# Altium PCB SlowDanceBot.PcbDoc
Units mm, origin at the board's own origin, x right, y up, seen from the top; angles counter-clockwise.
Board outline 56.05 x 45.55 mm, 2 copper layers (Top Layer, Bottom Layer); 62 components, 35 nets, 152 pads, 42 vias.
Unrouted connection lines stored in the file: 1.
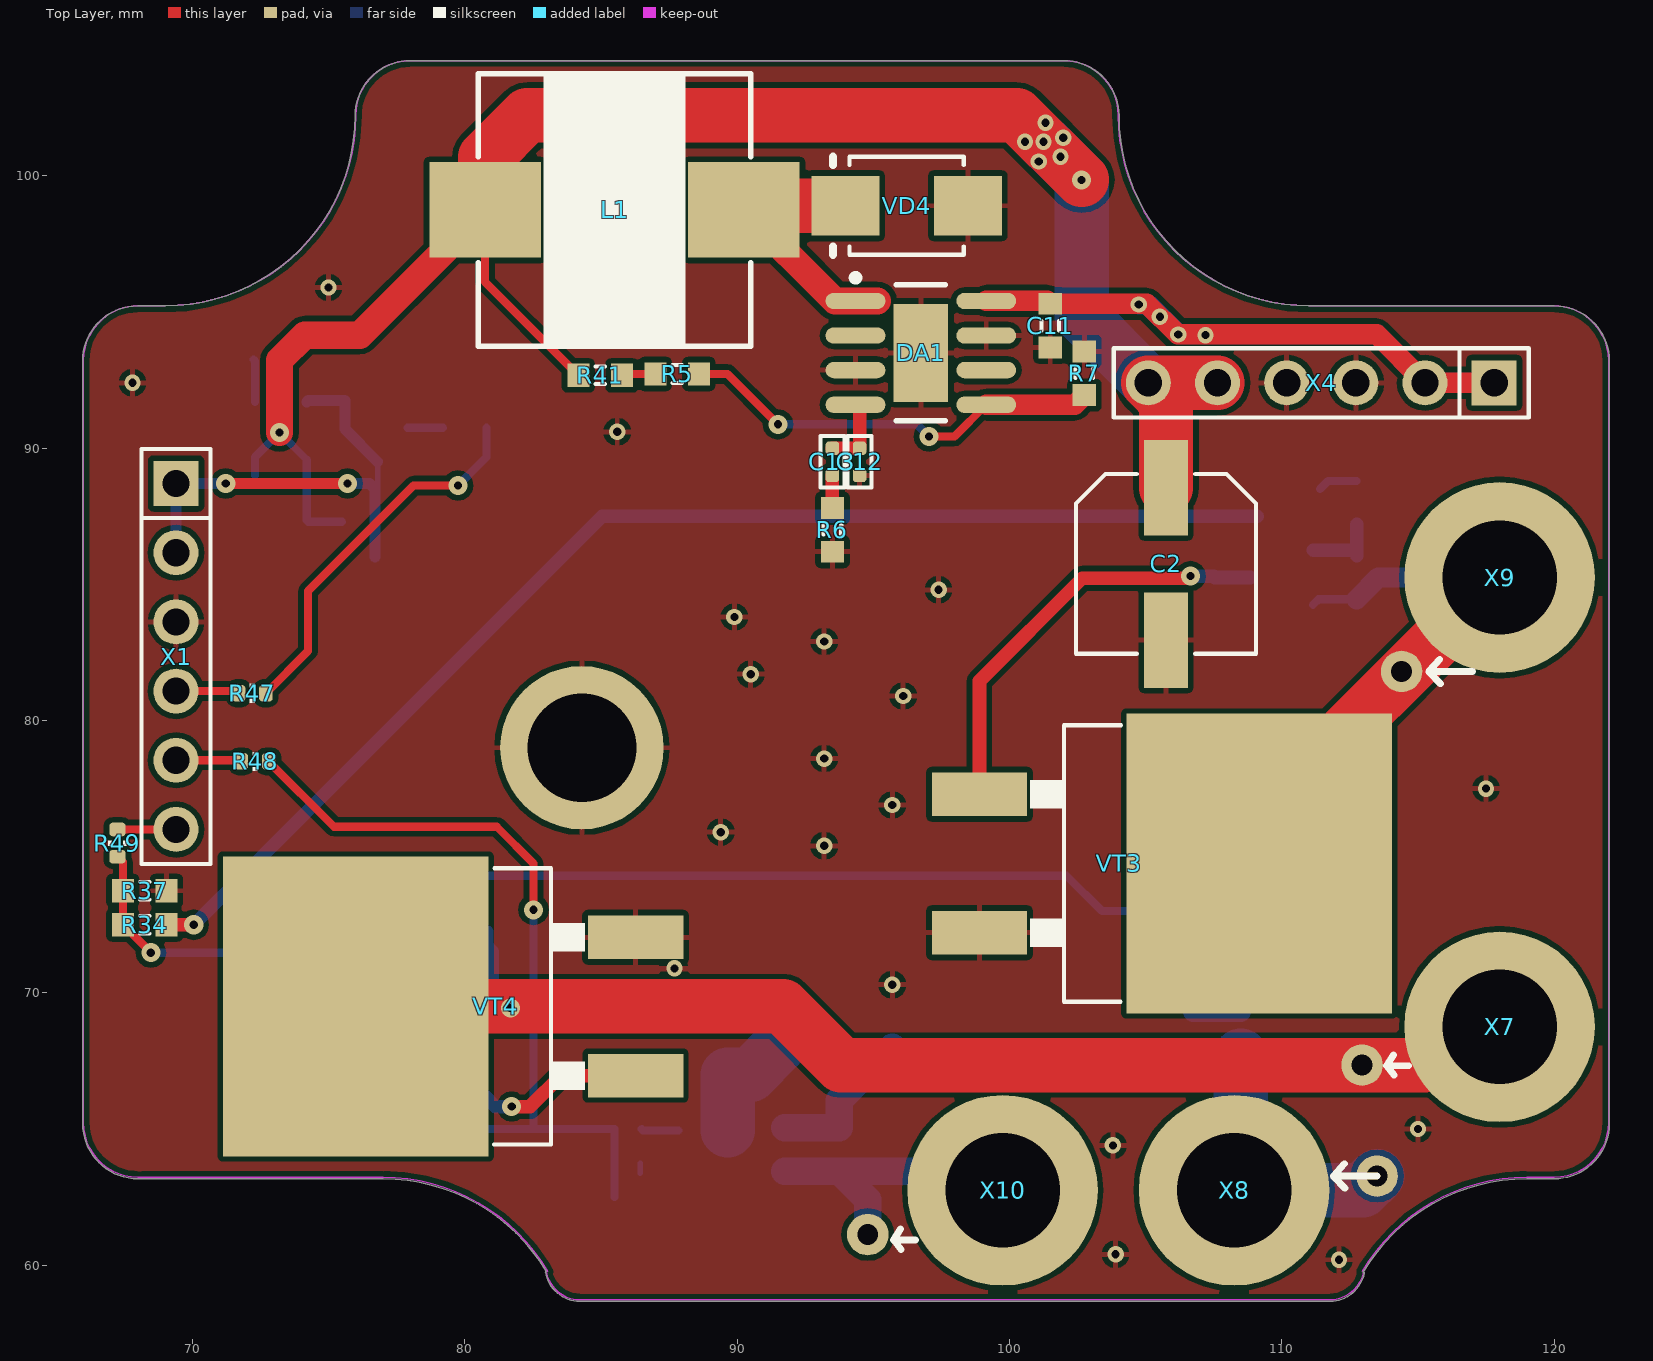
[diagram p0: Top Layer view]
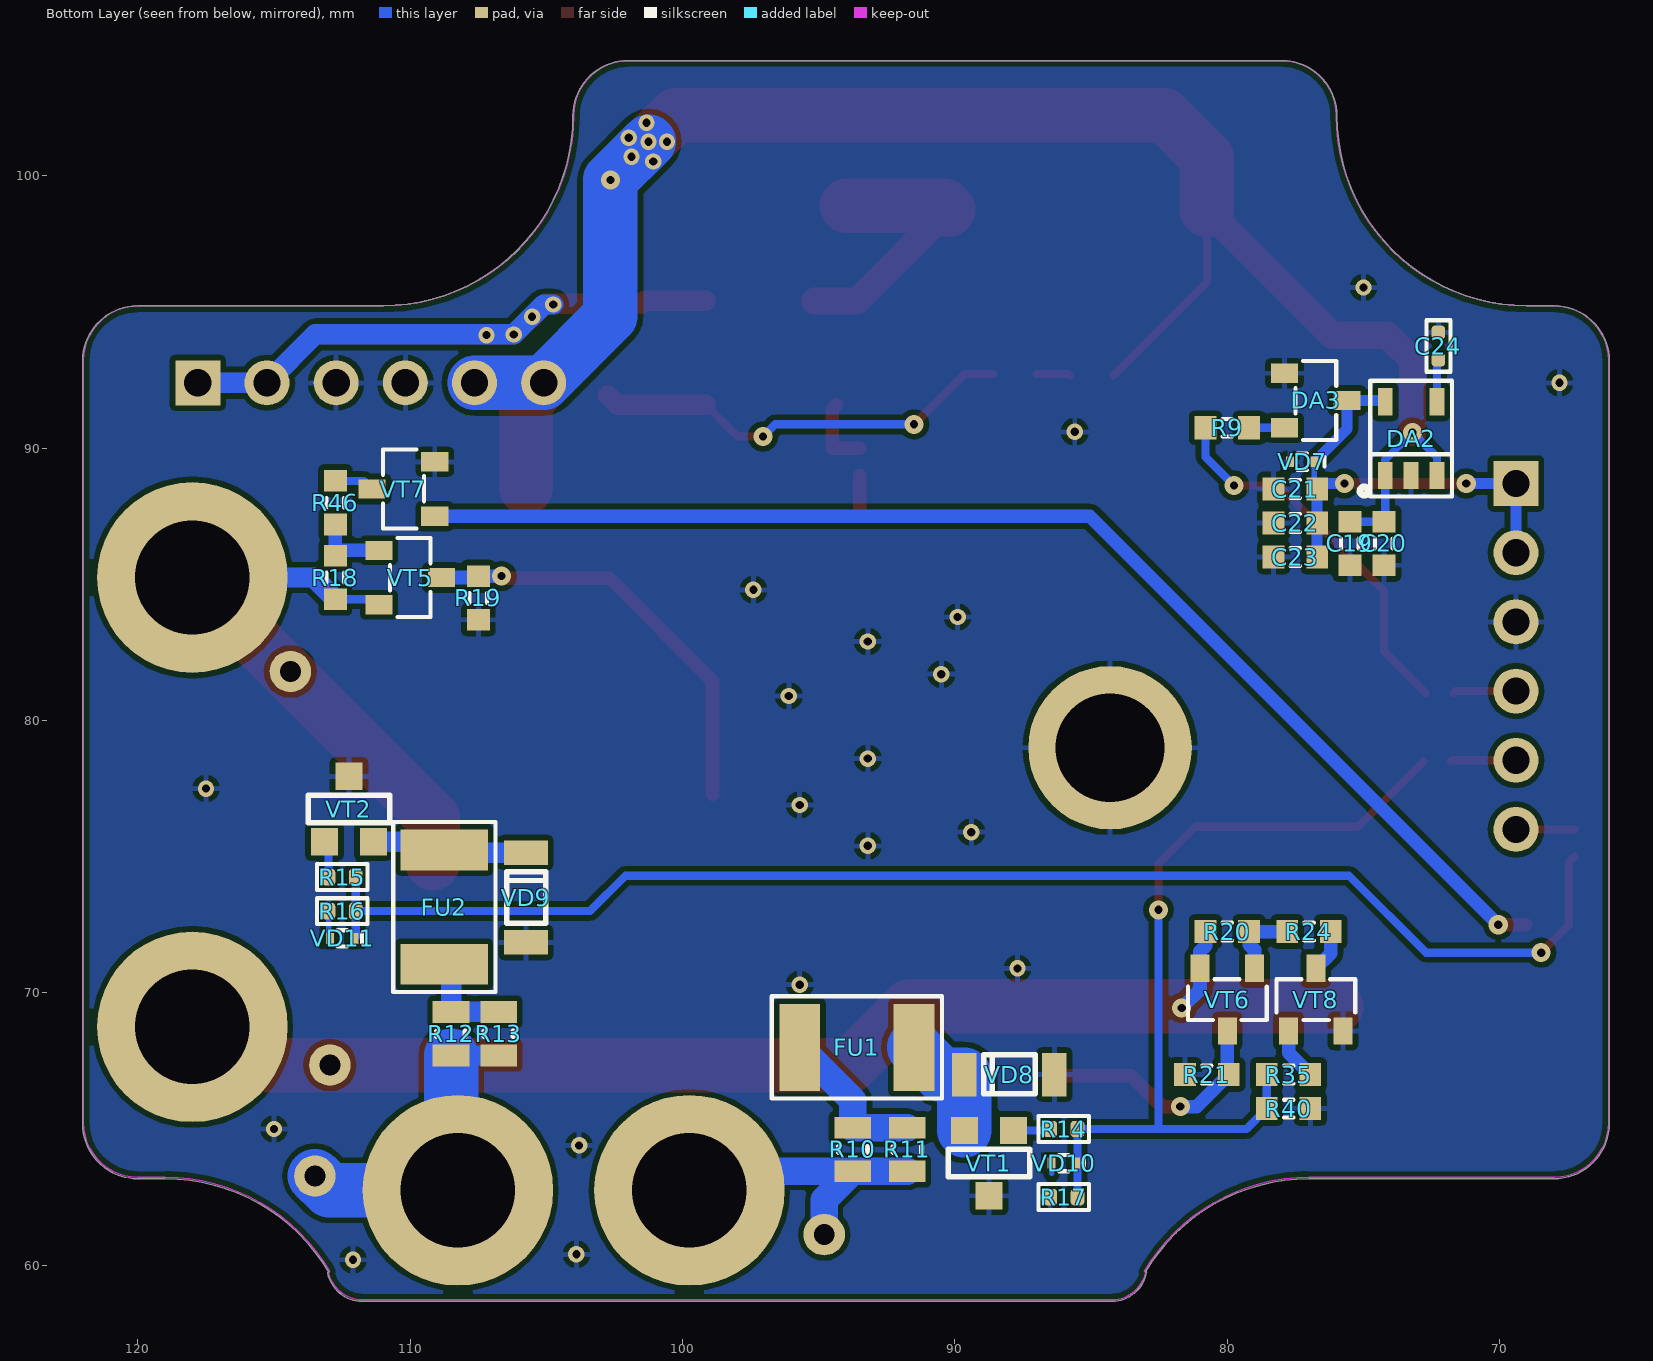
[diagram p1: Bottom Layer view, seen from below]
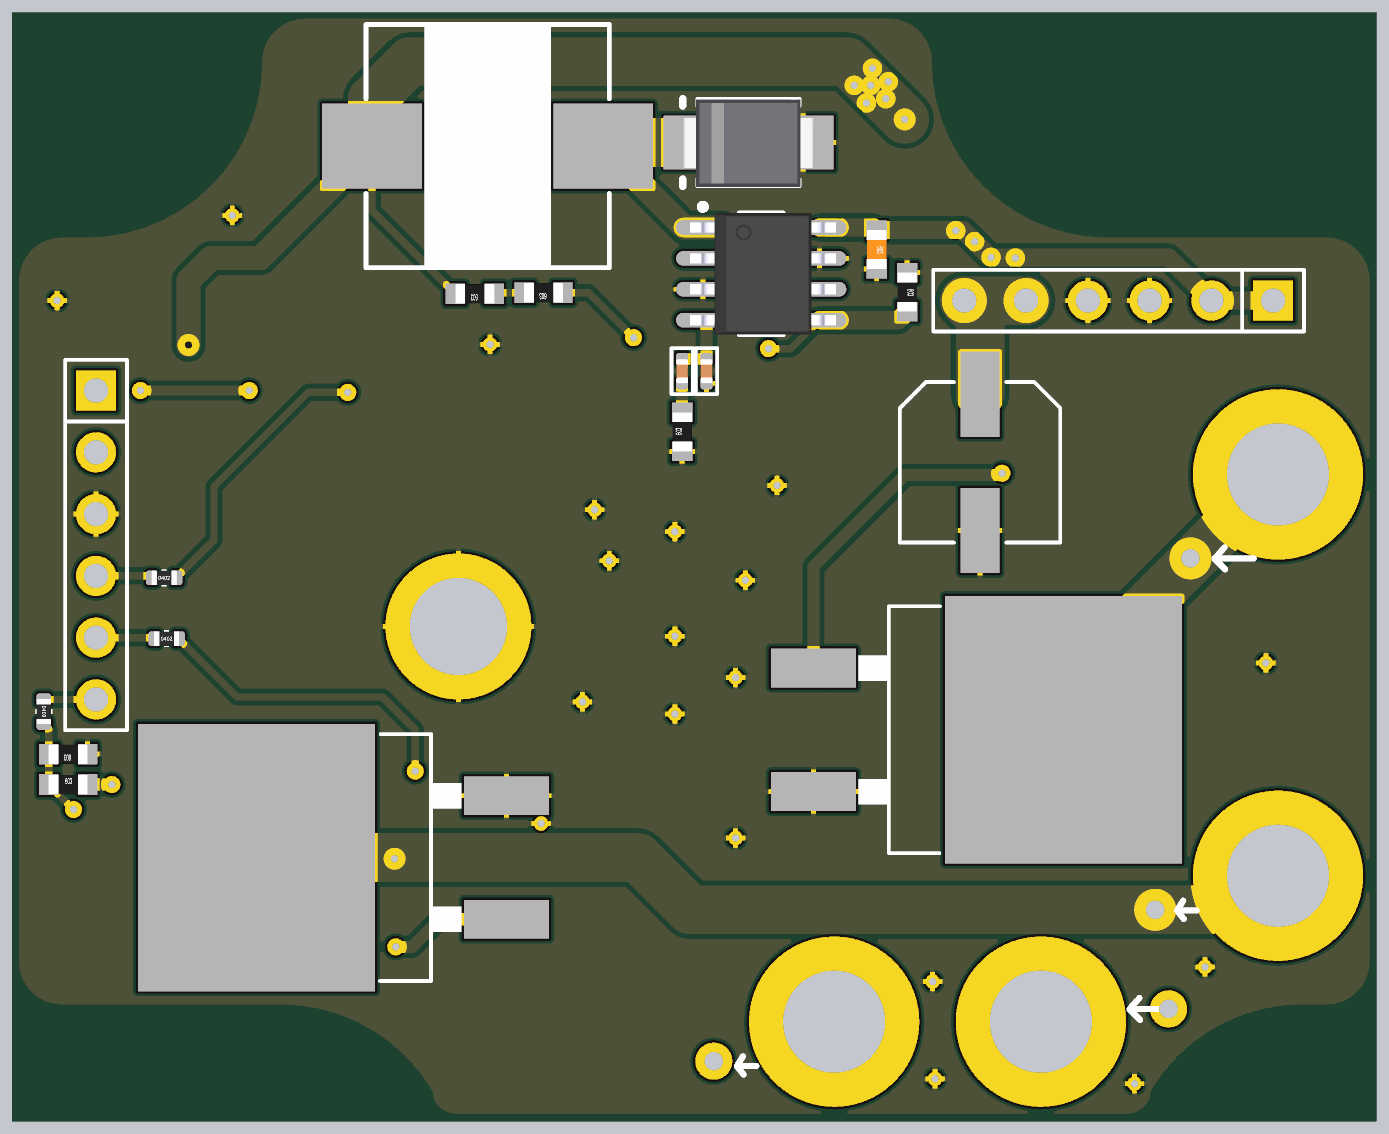
[diagram p2: 3D render of the assembled board from above, using the file's embedded part models]
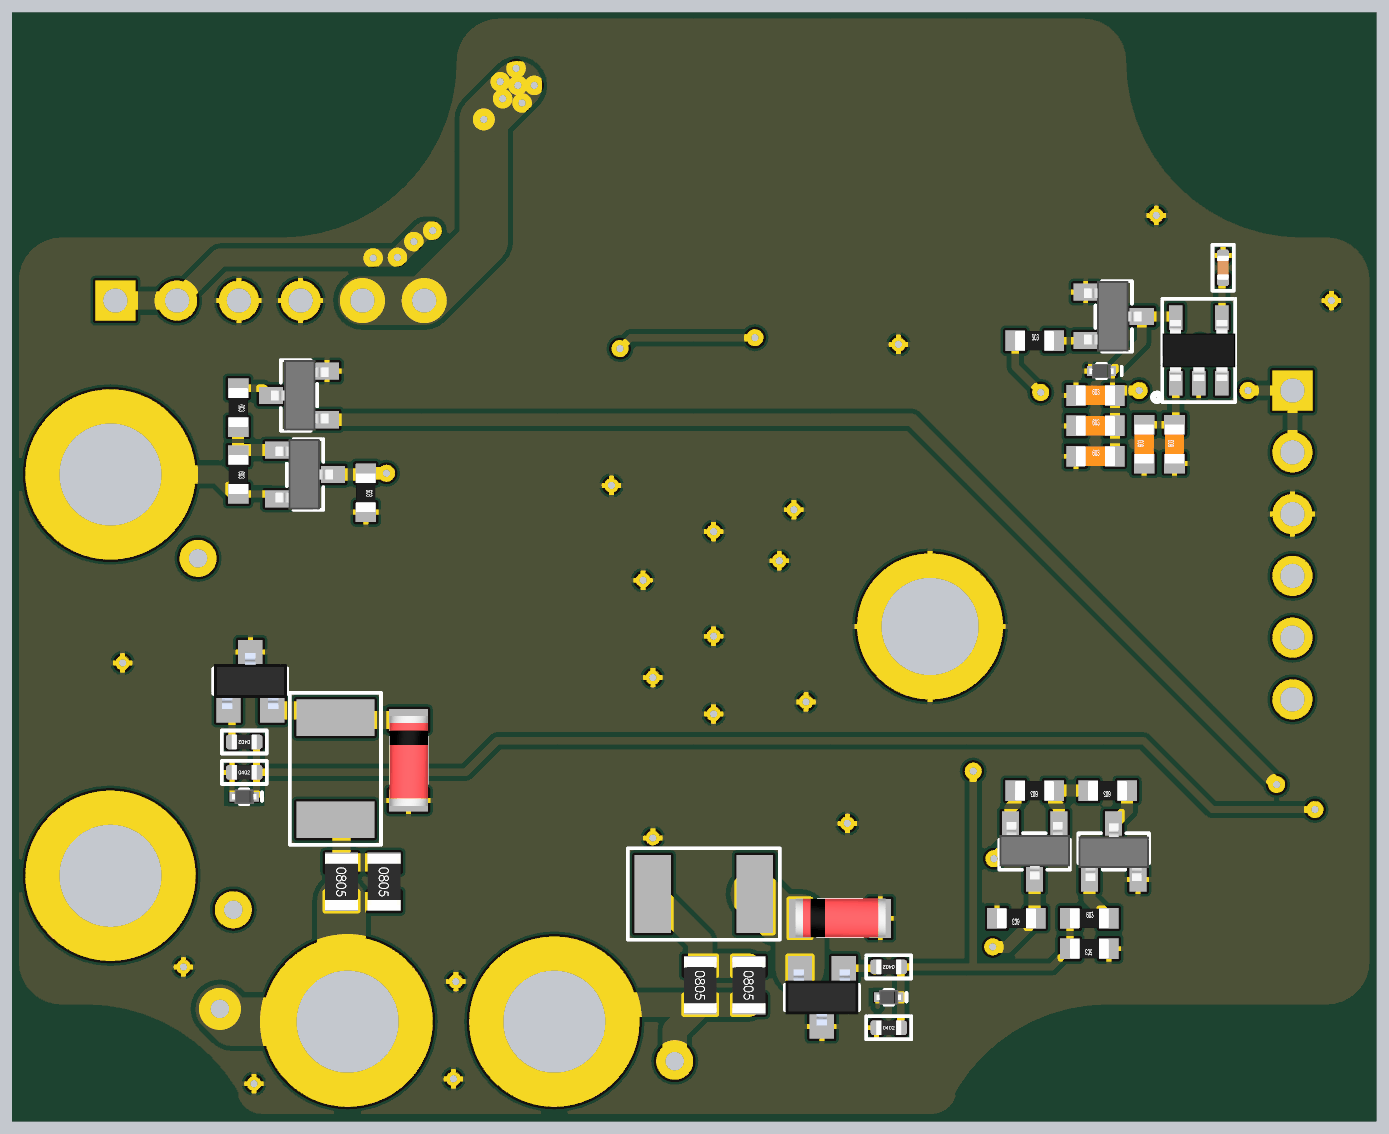
[diagram p3: 3D render of the assembled board from below, using the file's embedded part models]

## Layer stack, top to bottom
Top Solder: solder mask 0.0102, Solder Resist, Dk 3.5
Top Layer: signal copper 0.0356
Dielectric 1: dielectric 0.32, FR-4, Dk 4.8
Bottom Layer: signal copper 0.0356
Bottom Solder: solder mask 0.0102, Solder Resist, Dk 3.5

## Board outline
82.967,59.739 cw(c82.992,59.743) 82.993,59.768 ccw(c77,56.2) 77,63.175 68,63.175 cw(c68,63.2) 68,63.175 ccw(c68,65.2) 68,63.175 cw(c68,65.2) 65.975,65.2 65.975,93.2 cw(c68,93.2) 68,95.225 69,95.225 ccw(c69,102.2) 75.975,102.2 cw(c78,102.2) 78,104.225 102,104.225 cw(c102,102.2) 104.025,102.2 ccw(c111,102.2) 111,95.225 cw(c111,95.2) 111,95.225 120,95.225 cw(c120,93.2) 122.025,93.2 122.025,65.2 cw(c120,65.2) 120,63.175 119,63.175 ccw(c119,56.2) 112.993,59.744 cw(c113.004,59.721) 113.03,59.721 cw(c113.004,59.721) 113.029,59.716 cw(c111.766,59.962) 111.771,58.675 cw(c111.766,58.7) 111.766,58.675 84.234,58.675 cw(c84.234,58.7) 84.232,58.675 cw(c84.234,59.962)

## Design rules (kind name [scope] priority, off if disabled: settings)
Clearance "Any-same nets" [All] p1: gap=0.1 ignorepadtopadclearanceinfootprint=FALSE except(0: Arc-Hole Track-Hole SMDPad-Hole THPad-Hole Via-Hole Fill-Hole Poly-Hole Region-Hole Text-Hole; 0.2: Arc-Poly Track-Track Track-Poly SMDPad-Poly THPad-Poly Via-Poly Fill-Poly Poly-Poly) // все, кроме настроек одинаковых цепей
DiffPairsRouting [All] p1: maxlimit=0.5 minlimit=0.1 mostfreqgap=0.2 toplayer_minwidth=0.1 toplayer_maxwidth=0.4 toplayer_prefwidth=0.3 bottomlayer_minwidth=0.1 bottomlayer_maxwidth=0.4 bottomlayer_prefwidth=0.3 maxuncoupledlength=0.2
PlaneClearance [All] p1: clearance=0.5
PlaneConnect [All] p1: planeconnectstyle=Relief reliefexpansion=0.5 reliefentries=4 reliefconductorwidth=0.2 reliefairgap=0.2
PolygonConnect [All] p1: connectstyle=Relief reliefconductorwidth=0.2 reliefentries=4 polygonreliefangle="90 Angle" airgapwidth=0.2
RoutingVias [All] p1: holewidth=0.3 width=0.7 viastyle="Through Hole" minholewidth=0.3 minwidth=0.6 maxholewidth=0.7 maxwidth=1.27
SolderMaskExpansion [All] p1: expansion=0.102
Width IN [InNet('IN')] p1: maxlimit=2 minlimit=0.3 preferedwidth=0.5
Width 3V3 [InNet('3V3')] p2: maxlimit=1 minlimit=0.2 preferedwidth=0.4
Width [All] p3: maxlimit=2 minlimit=0.2 preferedwidth=0.3
27 further rules are at their usual default settings.

## Components (designator, comment, footprint, x,y, rotation, side; value= is the part's Value field where it differs from the comment)
C2 "WE 875105144010" "CAP 6.3 x 5.8" 105.75,85.75 r270 top value="330 мкФ 6.3 В"
C11 "C0603-X5R-16В-10мФ" C0603_HD 101.5,94.5 r270 top value=10мкФ
C12 "C0402-X7R-16В-220pFФ-10%" C0402_HD 94.5,89.5 r90 top value="220 пФ"
C13 "C0402-X7R-16В-22nF-10%" C0402_HD 93.5,89.5 r90 top value=22нФ
C19 "C0603-X5R-16В-1мкФ" C0603_HD 75.5,86.5 r90 bottom value="1 мкФ"
C20 "C0603-X5R-16В-0.1мкФ" C0603_HD 74.25,86.5 r90 bottom value="0.1 мкФ"
C21 "C0603-X5R-16В-0.1мкФ" C0603_HD 77.5,88.5 r180 bottom value="0.1 мкФ"
C22 "C0603-X5R-16В-1мкФ" C0603_HD 77.5,87.25 r180 bottom value="1 мкФ"
C23 "C0603-X5R-16В-10мФ" C0603_HD 77.5,86 r180 bottom value=10мкФ
C24 "C0402-X7R-16В-10nF-10%" C0402_HD 72.25,93.75 r90 bottom value=10нФ
DA1 "L5973D" SOIC-8EP 96.75,93.5 r0 top
DA2 "LP2985-33DBV" "SOT-23-5 (TI)" 74.2,89 r180 bottom
DA3 "STM809SWX6F (ST)" SOT-23#1 76.75,91.75 r270 bottom
FU1 "MF-MSMF020/60-2" MF-MSMF020/60 91.5,68 r0 bottom
FU2 "MF-MSMF020/60-2" MF-MSMF020/60 108.75,75.25 r270 bottom
L1 "WE 74437368100" "WE 74437368xxxx" 85.5,98.75 r180 top value="10 мкГн"
R5 "R0603-13кОм-1%" R0603_HD 87.8,92.725 r180 top value=13кОм-1%
R6 "R0603-4.7кОм-5%" R0603_HD 93.5,87 r90 top value="4.7 кОм"
R7 "R0603-3.3кОм-1%" R0603_HD 102.75,92.75 r270 top value="3.3 кОм 1%"
R9 "R0603-1кОм-5%" R0603_HD 80,90.75 r180 bottom value="1 кОм"
R10 "R0805-5.1Ом-5%" R0805_HD 93.75,64.25 r270 bottom value="5.1 Ом"
R11 "R0805-5.1Ом-5%" R0805_HD 91.75,64.25 r270 bottom value="5.1 Ом"
R12 "R0805-5.1Ом-5%" R0805_HD 108.5,68.5 r270 bottom value="5.1 Ом"
R13 "R0805-5.1Ом-5%" R0805_HD 106.75,68.5 r270 bottom value="5.1 Ом"
R14 "R0402-100кОм-5%" R0402_HD 86,65 r0 bottom value="100 кОм"
R15 "R0402-100кОм-5%" R0402_HD 112.5,74.25 r0 bottom value="100 кОм"
R16 "R0402-10кОм-5%" R0402_HD 112.5,73 r180 bottom value="10 кОм"
R17 "R0402-10кОм-5%" R0402_HD 86,62.5 r180 bottom value="10 кОм"
R18 "R0603-100кОм-5%" R0603_HD 112.75,85.25 r270 bottom value=100кОм
R19 "R0603-100кОм-5%" R0603_HD 107.5,84.5 r270 bottom value=100кОм
R20 "R0603-100кОм-5%" R0603_HD 80,72.25 r0 bottom value=100кОм
R21 "R0603-100кОм-5%" R0603_HD 80.75,67 r0 bottom value=100кОм
R24 "R0603-1кОм-5%" R0603_HD 77,72.25 r0 bottom value=1кОм
R34 "R0603-300Ом-5%" R0603_HD 68.25,72.5 r0 top value=300Ом
R35 "R0603-300Ом-5%" R0603_HD 77.75,67 r180 bottom value=300Ом
R37 "R0603-100кОм-5%" R0603_HD 68.25,73.75 r180 top value=100кОм
R40 "R0603-100кОм-5%" R0603_HD 77.75,65.75 r0 bottom value=100кОм
R41 "R0603-300Ом-1%" R0603_HD 84.975,92.675 r180 top value="300 Ом 1%"
R46 "R0603-1кОм-5%" R0603_HD 112.75,88 r270 bottom value=1кОм
R47 "R0402-100Ом-5%" R0402_min 72.2,81 r0 top value="100 Ом"
R48 "R0402-100Ом-5%" R0402_min 72.3,78.5 r0 top value="100 Ом"
R49 "R0402-100Ом-5%" R0402_min 67.25,75.5 r270 top value="100 Ом"
VD4 "SSB44" DO214AA(SMB)_POL 96.225,98.9 r0 top
VD7 "ESD9L3.3ST5G" "SOD-923 (ON)"#1 77.25,89.5 r0 bottom
VD8 "BZV55-C68" sod80c 88,67 r0 bottom
VD9 "BZV55-C68" sod80c 105.75,73.5 r90 bottom
VD10 "ESD9L3.3ST5G" "SOD-923 (ON)"#2 86,63.75 r0 bottom
VD11 "ESD9L3.3ST5G" "SOD-923 (ON)"#2 112.5,72 r0 bottom
VT1 "IRLML0100TRPbF" SOT-23#2 88.75,63.75 r0 bottom
VT2 "IRLML0100TRPbF" SOT-23#2 112.25,76.75 r180 bottom
VT3 "STB80N20M5" "D2PAK-2 (ST)" 99,74.75 r270 top
VT4 "STB80N20M5" "D2PAK-2 (ST)" 86.175,69.5 r90 top
VT5 "MMBTA92" SOT-23#1 110,85.25 r270 bottom
VT6 "MMBTA92" SOT-23#1 80,69.75 r0 bottom
VT7 "BC817" SOT-23#1 110.25,88.5 r90 bottom
VT8 "BC817" SOT-23#1 76.75,69.75 r180 bottom
X1 "n/m PLS-6" PLS-06 69.4,88.7 r270 top
X4 "n/m PLS-6" PLS-06 117.8,92.4 r180 top
X7 "n/m" Connection_pad 118,68.75 r0 top
X8 "n/m" Connection_pad 108.25,62.75 r0 top
X9 "n/m" Connection_pad 118,85.25 r0 top
X10 "n/m" Connection_pad 99.75,62.75 r0 top

## Footprints (in the part's own frame and the unit in brackets; to place one, negate y for a bottom-side part, rotate by r counter-clockwise, add the part's x,y. Pads: shape width x height; smd on the part's side, far side on the other; paste and mask are expansions set on the pad)
C0402_HD [mm]
  rrect50% 0.5x0.5 smd: 1(0.5,0) 2(-0.5,0)
  silkscreen extent -0.94,-0.44 0.94,0.44, body extent -0.5,-0.25 0.5,0.25, height 0.48
C0603_HD [mm]
  rect 0.8x0.85 smd: 1(-0.8,0) 2(0.8,0)
  silkscreen extent -0.18,-0.33 0.18,0.33, body extent -0.8,-0.4 0.8,0.4, height 0.3
"CAP 6.3 x 5.8" [mm]
  rect 3.5x1.6 smd: 1(-2.8,0) 2(2.8,0)
  silkscreen extent -3.3,-3.3 3.3,3.3, body extent -3.3,-3.3 3.3,3.3, height 5.8
Connection_pad [mm]
  round 7 hole 4.2: 1(0,0)
"D2PAK-2 (ST)" [mm]
  rect 1.6x3.5 smd: 1(-2.54,-0.1) 3(2.54,-0.1)
  rect 11x9.75 smd: 2(0,10.175)
  silkscreen extent -5.07,1.75 5.07,5.1, body extent -5.08,-1.24 5.08,12.99, height 4.87
DO214AA(SMB)_POL [mm]
  rect 2.5x2.2 smd: 1(2.25,0) 2(-2.25,0)
  silkscreen extent -2.7,-1.8 2.1,1.8, body extent -2.7,-1.83 2.7,1.77, height 2.3
MF-MSMF020/60 [mm]
  rect 1.5x3.2 smd: 1(0,0) 2(4.2,0)
  silkscreen extent -1.02,-1.88 5.23,1.88, body extent -0.63,-1.7 4.83,1.7, height 1
PLS-06 [mm]
  rect 1.65x1.65 hole 1: 1(0,0)
  round 1.65 hole 1: 2(2.54,0) 3(5.08,0) 4(7.62,0) 5(10.16,0) 6(12.7,0)
  silkscreen extent -1.27,-1.27 13.97,1.27
R0402_HD [mm]
  rrect50% 0.5x0.6 smd: 1(-0.5,0) 2(0.5,0)
  silkscreen extent -0.92,-0.48 0.92,0.48, body extent -0.52,-0.3 0.52,0.3, height 0.34
R0402_min [mm]
  rrect50% 0.5x0.6 smd: 1(-0.5,0) 2(0.5,0)
  silkscreen extent -0.1,-0.35 0.1,0.35, body extent -0.52,-0.3 0.52,0.3, height 0.34
R0603_HD [mm]
  rect 0.8x0.85 smd: 1(-0.8,0) 2(0.8,0)
  silkscreen extent -0.18,-0.33 0.18,0.33, body extent -0.8,-0.4 0.8,0.4, height 0.3
R0805_HD [mm]
  rect 0.8x1.35 smd: 1(-0.8,0) 2(0.8,0)
  silkscreen extent -0.1,-0.53 0.1,0.53, body extent -1.15,-0.67 1.15,0.68, height 0.76
sod80c [mm]
  rect 0.9x1.6 smd: 1(-1.65,0) 2(1.65,0)
  silkscreen extent -0.95,-0.72 0.95,0.7, body extent -1.88,-0.81 1.82,0.79, height 1.61
"SOD-923 (ON)"#1 [mm]
  rect 0.3x0.4 smd: 1(-0.45,0) 2(0.45,0)
  silkscreen extent -0.82,-0.3 0.18,0.3, body extent -0.5,-0.3 0.5,0.3, height 0.4
"SOD-923 (ON)"#2 [mm]
  rect 0.3x0.4 smd mask+0.05: 1(-0.45,0) 2(0.45,0)
  Top Layer pour cut-out: -0.075,-0.375 -0.825,-0.375 -0.825,0.375 -0.075,0.375
  Top Layer pour cut-out: 0.075,0.375 0.825,0.375 0.825,-0.375 0.075,-0.375
  silkscreen extent -0.73,-0.3 0.18,0.3, body extent -0.5,-0.3 0.5,0.3, height 0.4
SOIC-8EP [mm]
  oval 2.2x0.6 smd: 1(-2.4,1.905) 2(-2.4,0.635) 3(-2.4,-0.635) 4(-2.4,-1.905) 5(2.4,-1.905) 6(2.4,-0.635) 7(2.4,0.635) 8(2.4,1.905)
  rect 2x3.6 smd: 9(0,0)
  silkscreen extent -2.52,-2.5 0.9,2.88, body extent -2.93,-2.5 3.08,2.5, height 1.75
SOT-23#1 [mm]
  rect 0.7x1 smd: 1(-1,-1.15) 2(1,-1.15) 3(0,1.15)
  silkscreen extent -1.45,-0.75 1.45,0.75, body extent -1.45,-1.22 1.45,1.15, height 1
SOT-23#2 [mm] "КТ-46"
  rect 1x1 smd: 1(-0.9,-1.2) 2(0,1.2) 3(0.9,-1.2)
  silkscreen extent -1.5,-0.5 1.5,0.5, body extent -1.5,-1.15 1.5,1.15, height 1.11
"SOT-23-5 (TI)" [mm]
  rect 0.55x1 smd: 1(0,0) 2(0.95,0) 3(1.9,0) 4(1.9,2.7) 5(0,2.7)
  silkscreen extent -0.93,-0.77 2.45,3.47, body extent -0.55,0.1 2.45,2.6, height 1.05
"WE 74437368xxxx" [mm]
  rect 4.1x3.5 smd: 1(-4.75,0) 2(4.75,0)
  silkscreen extent -5,-5 5,5, body extent -5,-5 5,5, height 4

## Part data
C2: library part "CAP 875105144010"
C11 C19 C20 C21 C22 C23: library part C0603_HD
C12 C13 C24: library part C0402
DA2: library part LP2985-xxDBV
DA3: library part LM809M3-2.93
FU1 FU2: library part MF-MSMF
L1: library part "WE 74437368xxxx"
R5 R6 R7 R9 R18 R19 R20 R21 R24 R34 R35 R37 R40 R41 R46: library part R0603
R10 R11 R12 R13: library part R0805
R14 R15 R16 R17 R47 R48 R49: library part R0402
VD8 VD9: library part BZV55
VD10 VD11: library part ESD9L5.0ST5G
VT1 VT2: library part 2N7002
VT5 VT6: library part MMBT5401
X1 X4: library part PLS-6
X7 X8 X9 X10: library part "CONNECT PAD"

## Free pads (board coordinates)
  round 6 hole 4: 0(84.3,79)
  round 1.524 hole 0.762: 2(112.95,67.35) 3(113.5,63.275) 5(94.8,61.125) 6(114.4,81.8)

## Via types
v1: diameter 0.6, hole 0.3, Top Layer to Bottom Layer, 29 vias
v2: diameter 0.7, hole 0.3, Top Layer to Bottom Layer, 13 vias

## Nets (pads, with @x,y where several pads share a name; then routed paths per layer and width w, separated by ;. In a path a pad name is that pad's centre, name@x,y a point inside that pad or via, vN(x,y) a via of type N, cw(c..) or ccw(c..) an arc to the next point about the centre after c; other vN are vias at no path point)
3V3: C21.2 C22.2 C23.2 DA2.5 DA3.3 VD7.1 X1.1 X1.2 | length 17.6
  Top Layer w0.4: v2(71.225,88.7) v2(75.7,88.7)
  Bottom Layer w0.2: C21.2 76.8,88.6 VD7.1
  Bottom Layer w0.4: X1.2 X1.1 v2(71.225,88.7) ; DA2.5 74.25,91.75 DA3.3 75.6,90.7 VD7.1 ; v2(75.7,88.7) 76.5,88.7 C21.2 C22.2 C23.2
5V: C2.1 C19.2 C20.2 DA2.1 DA2.3 L1.2 R41.2 X4.5 X4.6 | length 72
  Top Layer w0.3: L1.2 80.75,96.1 R41.2
  Top Layer w1: v2(73.2,90.575) 73.2,93.225 74.125,94.15 76.15,94.15 L1.2
  Top Layer w2: L1.2 80.75,100.675 82.3,102.225 100.275,102.225 v2(102.65,99.85) ; C2.1 105.75,91.75 X4.6 X4.5
  Bottom Layer w0.3: DA2.3 72.3,89.675 v2(73.2,90.575) 74.2,89.575 DA2.1 74.2,87.35 C20.2 C19.2
  Bottom Layer w2: v1(101.25,101.25) v2(102.65,99.85) 102.65,94.85 X4.6 X4.5
  other v1: 101.075,100.525 101.875,100.7 100.575,101.25 101.975,101.4 101.325,101.95
+12В: C11.1 DA1.8 X4.1 X4.2 | length 34.1
  Top Layer w0.75: DA1.8 101.395,95.405 C11.1 105.05,95.3 106.175,94.175 113.485,94.175 X4.2 X4.1
  Bottom Layer w0.75: v1(104.75,95.275) 105.1,95.275 v1(106.2,94.175) 113.485,94.175 X4.2 X4.1
  other v1: 107.2,94.15 105.525,94.825
GND: C2.2 C11.2 C12.2 C19.1 C20.1 C21.1 C22.1 C23.1 C24.1 DA1.3 DA1.7 DA1.9 DA2.2 DA3.1 pad.0 R6.1 R7.1 R16.1 R17.1 R19.2 R21.2 R37.1 R40.1 VD4.1 VD7.2 VD8.1 VD9.1 VD10.2 VD11.2 VT1.2 VT2.2 VT3.3 VT4.3 VT7.2 VT8.2 X1.3 X4.3 X4.4 | length 1.4
  Bottom Layer w0.2: 86.45,63.375 VD10.2 ; VD11.2 113,72.05 R16.1
  other v1: 112.1,60.2 103.9,60.4 103.8,64.4 115,65 95.7,70.3 87.7,70.9 93.2,75.4 89.4,75.9 95.7,76.9 117.5,77.5 93.2,78.6 96.1,80.9 90.5,81.7 93.2,82.9 89.9,83.8 97.4,84.8 85.6,90.6 67.8,92.4 75,95.9
NetC12_1: C12.1 C13.1 DA1.4 | length 2.7
  Top Layer w0.5: C13.1 C12.1 94.5,91.445 DA1.4
NetC13_2: C13.2 R6.2 | length 1.2
  Top Layer w0.5: R6.2 C13.2
NetC24_2: C24.2 DA2.4 | length 1.6
  Bottom Layer w0.3: C24.2 72.3,93.2 DA2.4
NetDA1_1: DA1.1 L1.1 VD4.2 | length 10.1
  Top Layer w1: L1.1 93.595,95.405 DA1.1 DA1.1@95.155,95.405
  Top Layer w2: L1.1 90.4,98.9 VD4.2
NetDA1_5: DA1.5 R5.1 R7.2 | length 15.7
  Top Layer w0.3: R5.1 89.65,92.725 v2(91.5,90.875) ; v2(97.05,90.425) 97.98,90.425 DA1.5
  Top Layer w0.75: DA1.5 102.395,91.595 R7.2
  Bottom Layer w0.3: v2(91.5,90.875) 96.6,90.875 v2(97.05,90.425)
NetDA3_2: DA3.2 R9.2 | length 1.3
  Bottom Layer w0.3: DA3.2 R9.2
NetFU1_1: FU1.1 VD8.2 VT1.3 | length 4.3
  Bottom Layer w2: VT1.3 VD8.2 90.5,67 FU1.1
NetFU1_2: FU1.2 R10.1 R11.1 | length 6.8
  Bottom Layer w0.5: FU1.2@95.7,67 FU1.2
  Bottom Layer w1: R11.1 R10.1 93.75,66.05 FU1.2
NetFU2_1: FU2.1 VD9.2 VT2.3 | length 5.8
  Bottom Layer w0.75: VD9.2 108.65,75.15 FU2.1 109.05,75.55 VT2.3
NetFU2_2: FU2.2 R12.1 R13.1 | length 3.6
  Bottom Layer w0.75: R13.1 R12.1 108.5,70.8 FU2.2
NetR5_2: R5.2 R41.1 | length 1.2
  Top Layer w0.3: R41.1 85.825,92.725 R5.2
NetR9_1: R9.1 R47.2 | length 14.1
  Top Layer w0.3: R47.2 74.25,82.55 74.25,84.75 78.125,88.625 v2(79.75,88.625)
  Bottom Layer w0.3: v2(79.75,88.625) 80.8,89.675 R9.1
NetR10_2: pad.5 R10.2 R11.2 X10.1 | length 11
  Bottom Layer w1: R11.2 R10.2 ; pad.5 94.8,62.4 R10.2 ; X10.1 99.05,63.45 R10.2
NetR12_2: pad.3 R12.2 R13.2 X8.1 | length 12.3
  Bottom Layer w0.75: R13.2 R12.2
  Bottom Layer w2: R12.2 108.5,63 X8.1 112.975,62.75 pad.3
NetR14_1: R14.1 R17.2 R35.1 R40.2 R48.2 VD10.1 | length 32.1
  Top Layer w0.3: R48.2 75.2,76.1 81.175,76.1 82.525,74.75 v2(82.525,73.05)
  Bottom Layer w0.3: R35.1 R40.2 79.3,65 82.575,65 ; v2(82.525,73.05) 82.525,65.05 82.575,65 ; R17.2 R14.1 82.575,65
NetR14_2: R14.2 VT1.1 | length 1.4
  Bottom Layer w0.3: R14.2 86.55,64.95 VT1.1
NetR15_1: R15.1 R16.2 R34.1 R37.2 R49.2 VD11.1 | length 51.5
  Top Layer w0.3: R49.2 67.45,74.8 R37.2 R34.1 v2(68.475,71.475)
  Bottom Layer w0.3: v2(68.475,71.475) 72.7,71.475 75.525,74.3 102.1,74.3 103.4,73 R16.2 ; R15.1 112,72.05 VD11.1
NetR15_2: R15.2 VT2.1 | length 1.4
  Bottom Layer w0.3: R15.2 113,75.4 VT2.1
NetR18_1: R18.1 R46.2 VT5.1 | length 3.7
  Bottom Layer w0.3: R18.1 R46.2
  Bottom Layer w0.5: VT5.1 R18.1@112.55,86.25 ; R18.1 R46.2
NetR18_2: pad.6 R18.2 VT3.2 VT5.2 X9.1 | length 21.4
  Top Layer w2: VT3.2 109.175,76.425 X9.1
  Bottom Layer w0.3: VT5.2 111.35,84.45 R18.2
  Bottom Layer w0.75: R18.2 113.55,85.25 X9.1
NetR19_1: R19.1 VT3.1 VT5.3 | length 15.7
  Top Layer w0.5: VT3.1 98.9,81.45 102.675,85.225 v2@106.65,85.225
  Bottom Layer w0.5: v2(106.65,85.3) R19.1 107.55,85.25 VT5.3
NetR20_1: R20.1 R24.2 VT6.1 | length 2.8
  Bottom Layer w0.5: R24.2 R20.1 79.2,71.775 79,71.575 VT6.1
NetR20_2: pad.2 R20.2 VT4.2 VT6.2 X7.1 | length 46.6
  Top Layer w2: VT4.2 91.675,69.5 93.825,67.35 115.225,67.35 116.625,68.75 X7.1
  Bottom Layer w0.5: R20.2 80.8,71.725 81,71.525 VT6.2 81,70.125 v2(81.675,69.45)
NetR21_1: R21.1 VT4.1 VT6.3 | length 8.9
  Top Layer w0.5: v2(81.725,65.825) 82.4,65.825 83.535,66.96 VT4.1
  Bottom Layer w0.5: VT6.3 80,67.05 R21.1 81.125,65.825 v2(81.725,65.825)
NetR24_1: R24.1 VT8.3 | length 1.6
  Bottom Layer w0.5: R24.1 76.2,71.45 VT8.3
NetR34_2: R34.2 VT7.1 | length 46.3
  Top Layer w0.5: R34.2 v2(70.05,72.5)
  Bottom Layer w0.5: v2(70.05,72.5) 85.05,87.5 VT7.1
NetR35_2: R35.2 VT8.1 | length 1.9
  Bottom Layer w0.5: R35.2 77.75,67.8 VT8.1
NetR46_1: R46.1 VT7.3 | length 1.5
  Bottom Layer w0.3: VT7.3 111.7,88.8 R46.1
NetR47_1: R47.1 X1.4 | length 2.3
  Top Layer w0.3: X1.4 71.62,81.08 R47.1
NetR48_1: R48.1 X1.5 | length 2.4
  Top Layer w0.3: X1.5 71.76,78.54 R48.1
NetR49_1: R49.1 X1.6 | length 2.2
  Top Layer w0.3: R49.1 X1.6
pads on no net: DA1.2 DA1.6

## Polygon pours and split planes (outlines as drawn)
GND on Bottom Layer "Bottom Layer-GND" (solid, remove dead copper, pour order 10): 65,105 122.5,105 122.5,57.5 65,57.5
GND on Top Layer "Bottom Layer-GND" (solid, remove dead copper, pour order 12): 65,105 122.5,105 122.5,57.5 65,57.5

## Keep-outs
Keep-Out Layer:
  lines w0.05: 66,91.225 66,93.225 cw(c68,93.225) 68,95.225 69,95.225 ccw(c69,102.225) 76,102.225 cw(c78,102.225) 78,104.225 97.1,104.225 ; 66,91.425 66,65.225 ccw(c68,65.225) 68,63.225 77,63.225 cw(c77,56.225) 83.044,59.757 ; 82.992,59.768 ccw(c84.234,59.988) 84.25,58.726 ; 84.234,58.725 109.5,58.725 111.766,58.725 ; 96.25,104.225 102,104.225 cw(c102,102.225) 104,102.225 ccw(c111,102.225) 111,95.225 120,95.225 cw(c120,93.225) 122,93.225 122,66.825 ; 111.751,58.726 ccw(c111.766,59.987) 113.004,59.747 ; 112.956,59.757 cw(c119,56.225) 119,63.225 120,63.225 ccw(c120,65.225) 122,65.225 122,66.95

## Silkscreen, mask and mechanical layers (free items; w line width, h text height)
Top Overlay:
  lines w0.254: 96,61.325 95.75,60.925 ; 96.025,60.575 95.75,60.925 ; 96.55,60.925 95.75,60.925 ; 112.325,62.825 111.9,63.25 ; 113.5,63.275 111.9,63.275 ; 114.125,66.975 113.85,67.325 ; 114.65,67.325 113.85,67.325 ; 115.825,81.35 115.4,81.775 ; 117,81.8 115.4,81.8 ; 111.9,63.25 111.9,63.275 ; 111.9,63.25 111.9,63.275 ; 111.9,63.25 111.9,63.275 ; 111.9,63.275 112.3,63.725 111.9,63.275 ; 113.85,67.325 114.1,67.725 113.85,67.325 ; 115.4,81.775 115.4,81.8 ; 115.4,81.775 115.4,81.8 ; 115.4,81.775 115.4,81.8 ; 115.4,81.8 115.8,82.25 115.4,81.8